# Altium PCB Wikiot-II.PcbDoc (part 1 of 2)
Units mil, origin at the board's own origin, x right, y up, seen from the top; angles counter-clockwise.
Board outline 3930 x 3935 mil, 2 copper layers (Top Layer, Bottom Layer); 209 components, 179 nets, 926 pads, 255 vias.
Unrouted connection lines stored in the file: 39.
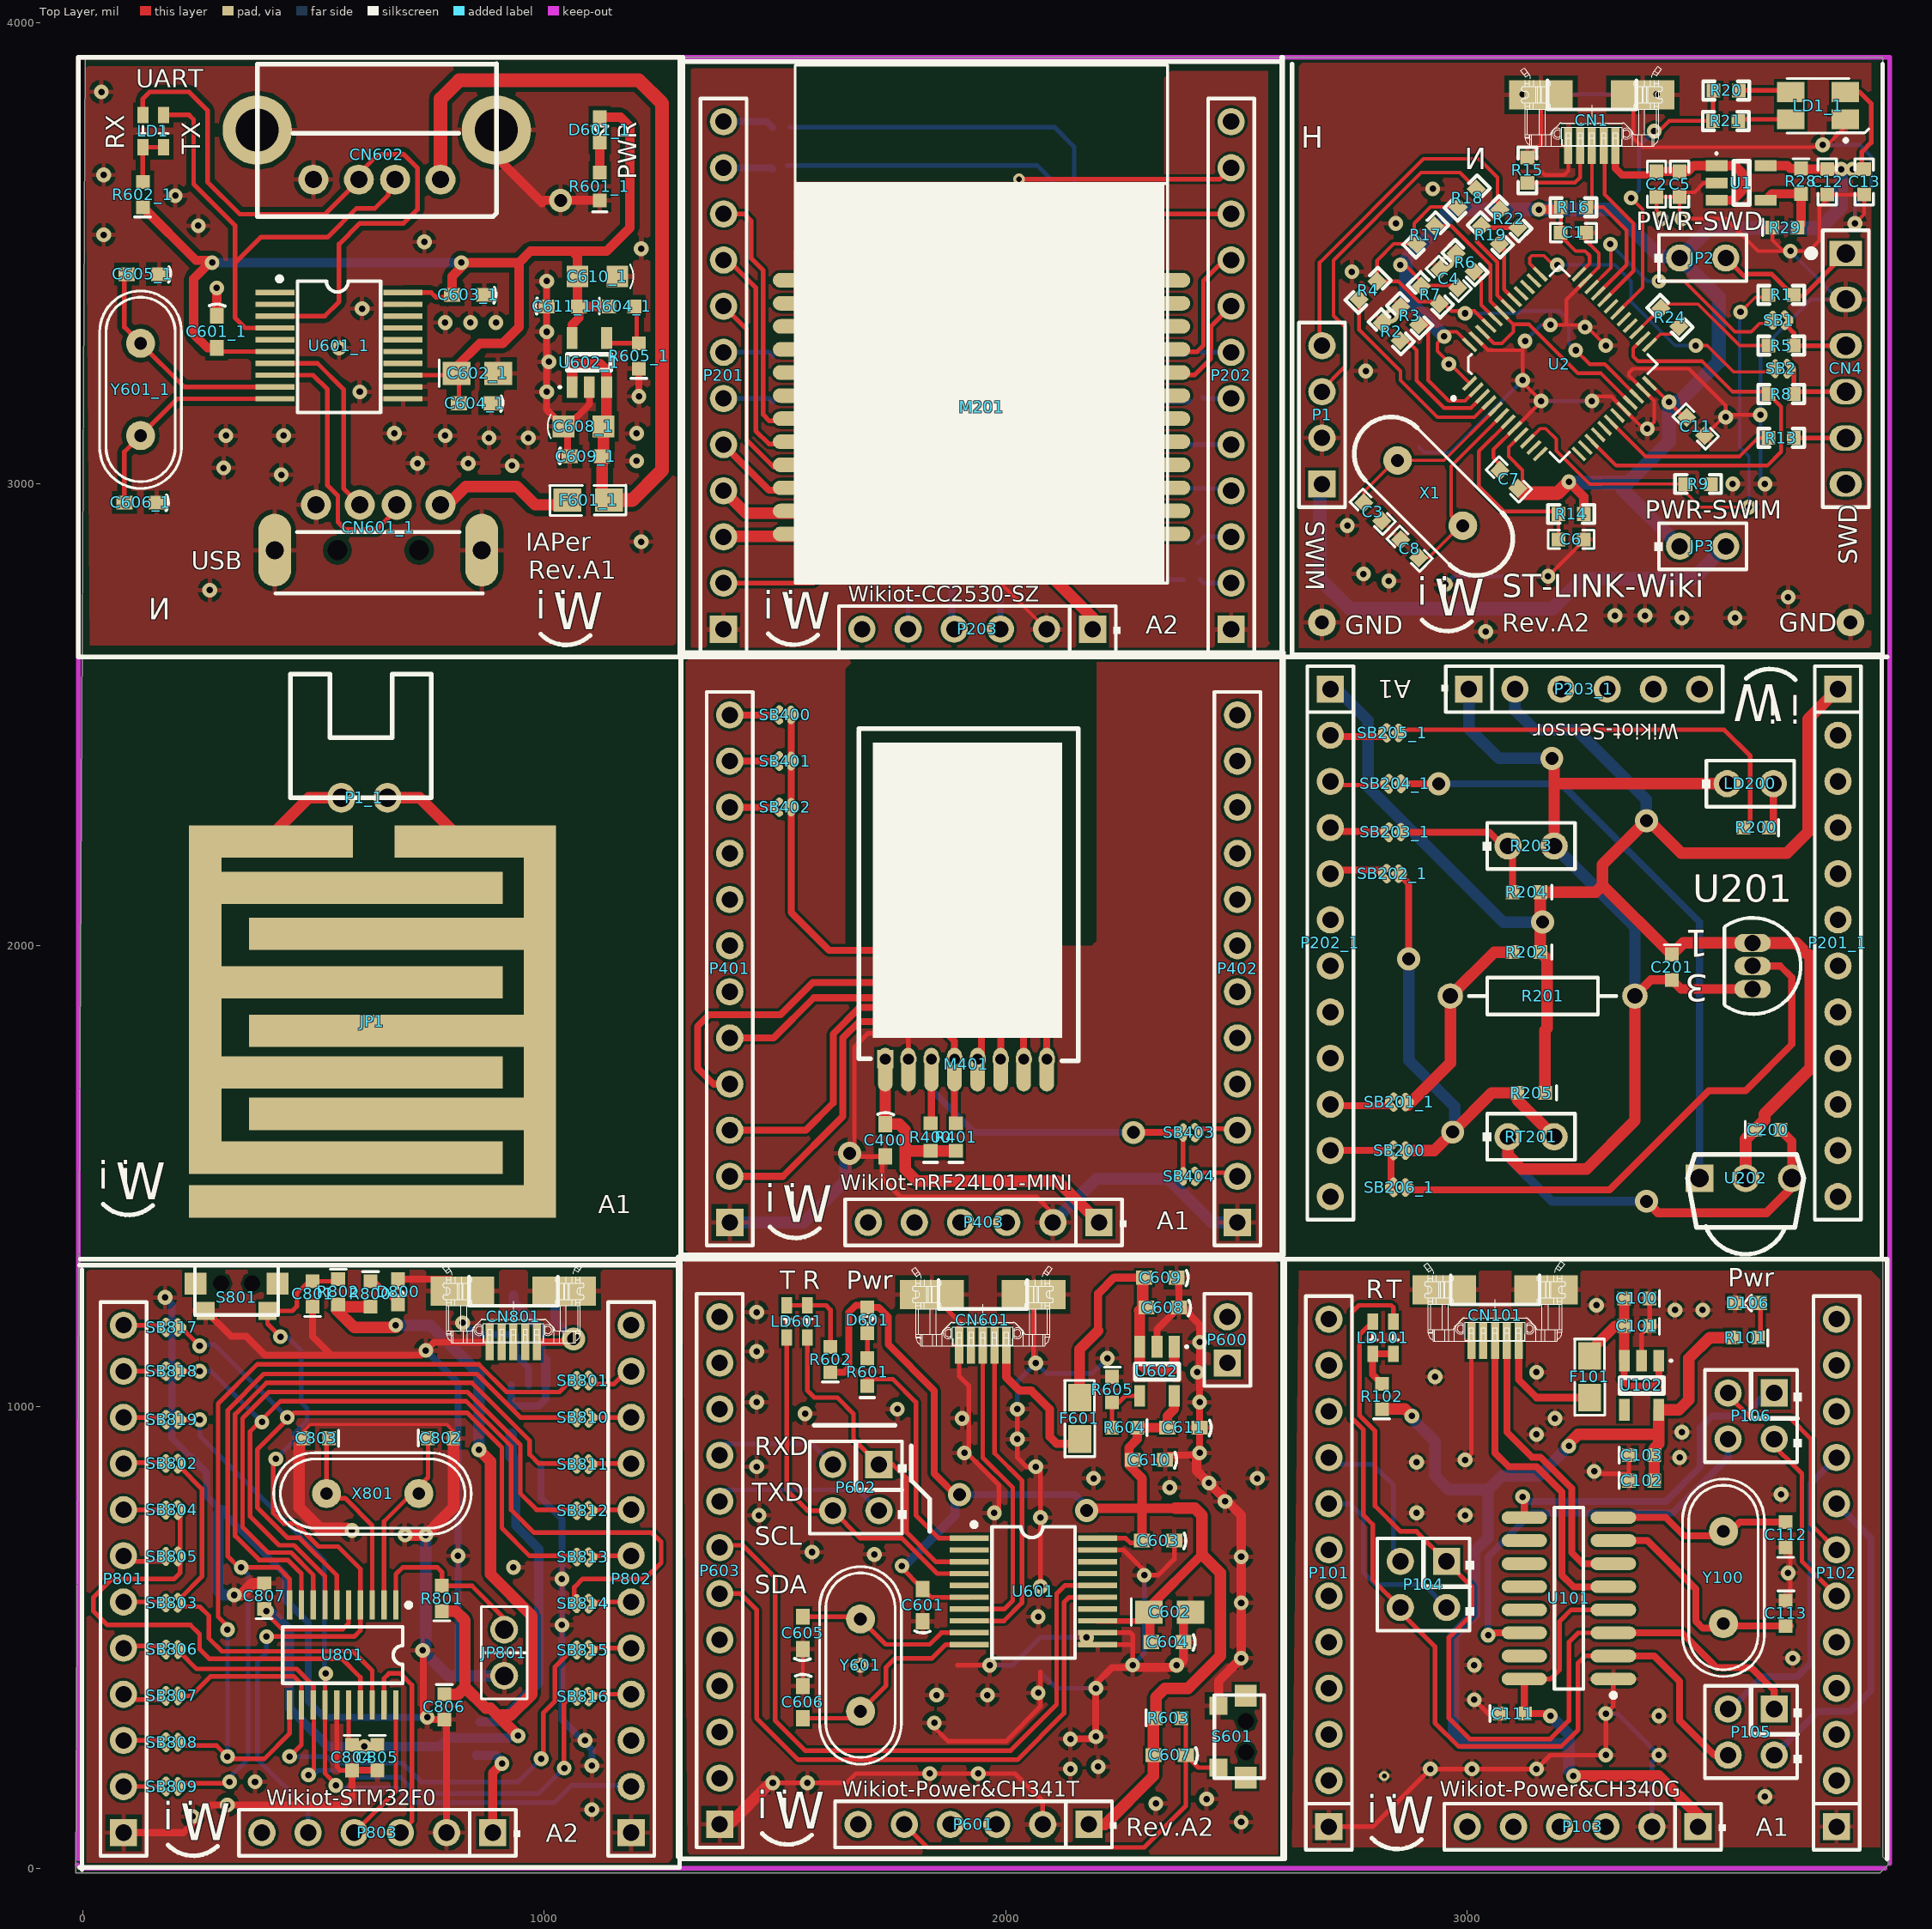
[diagram p0: Top Layer view]
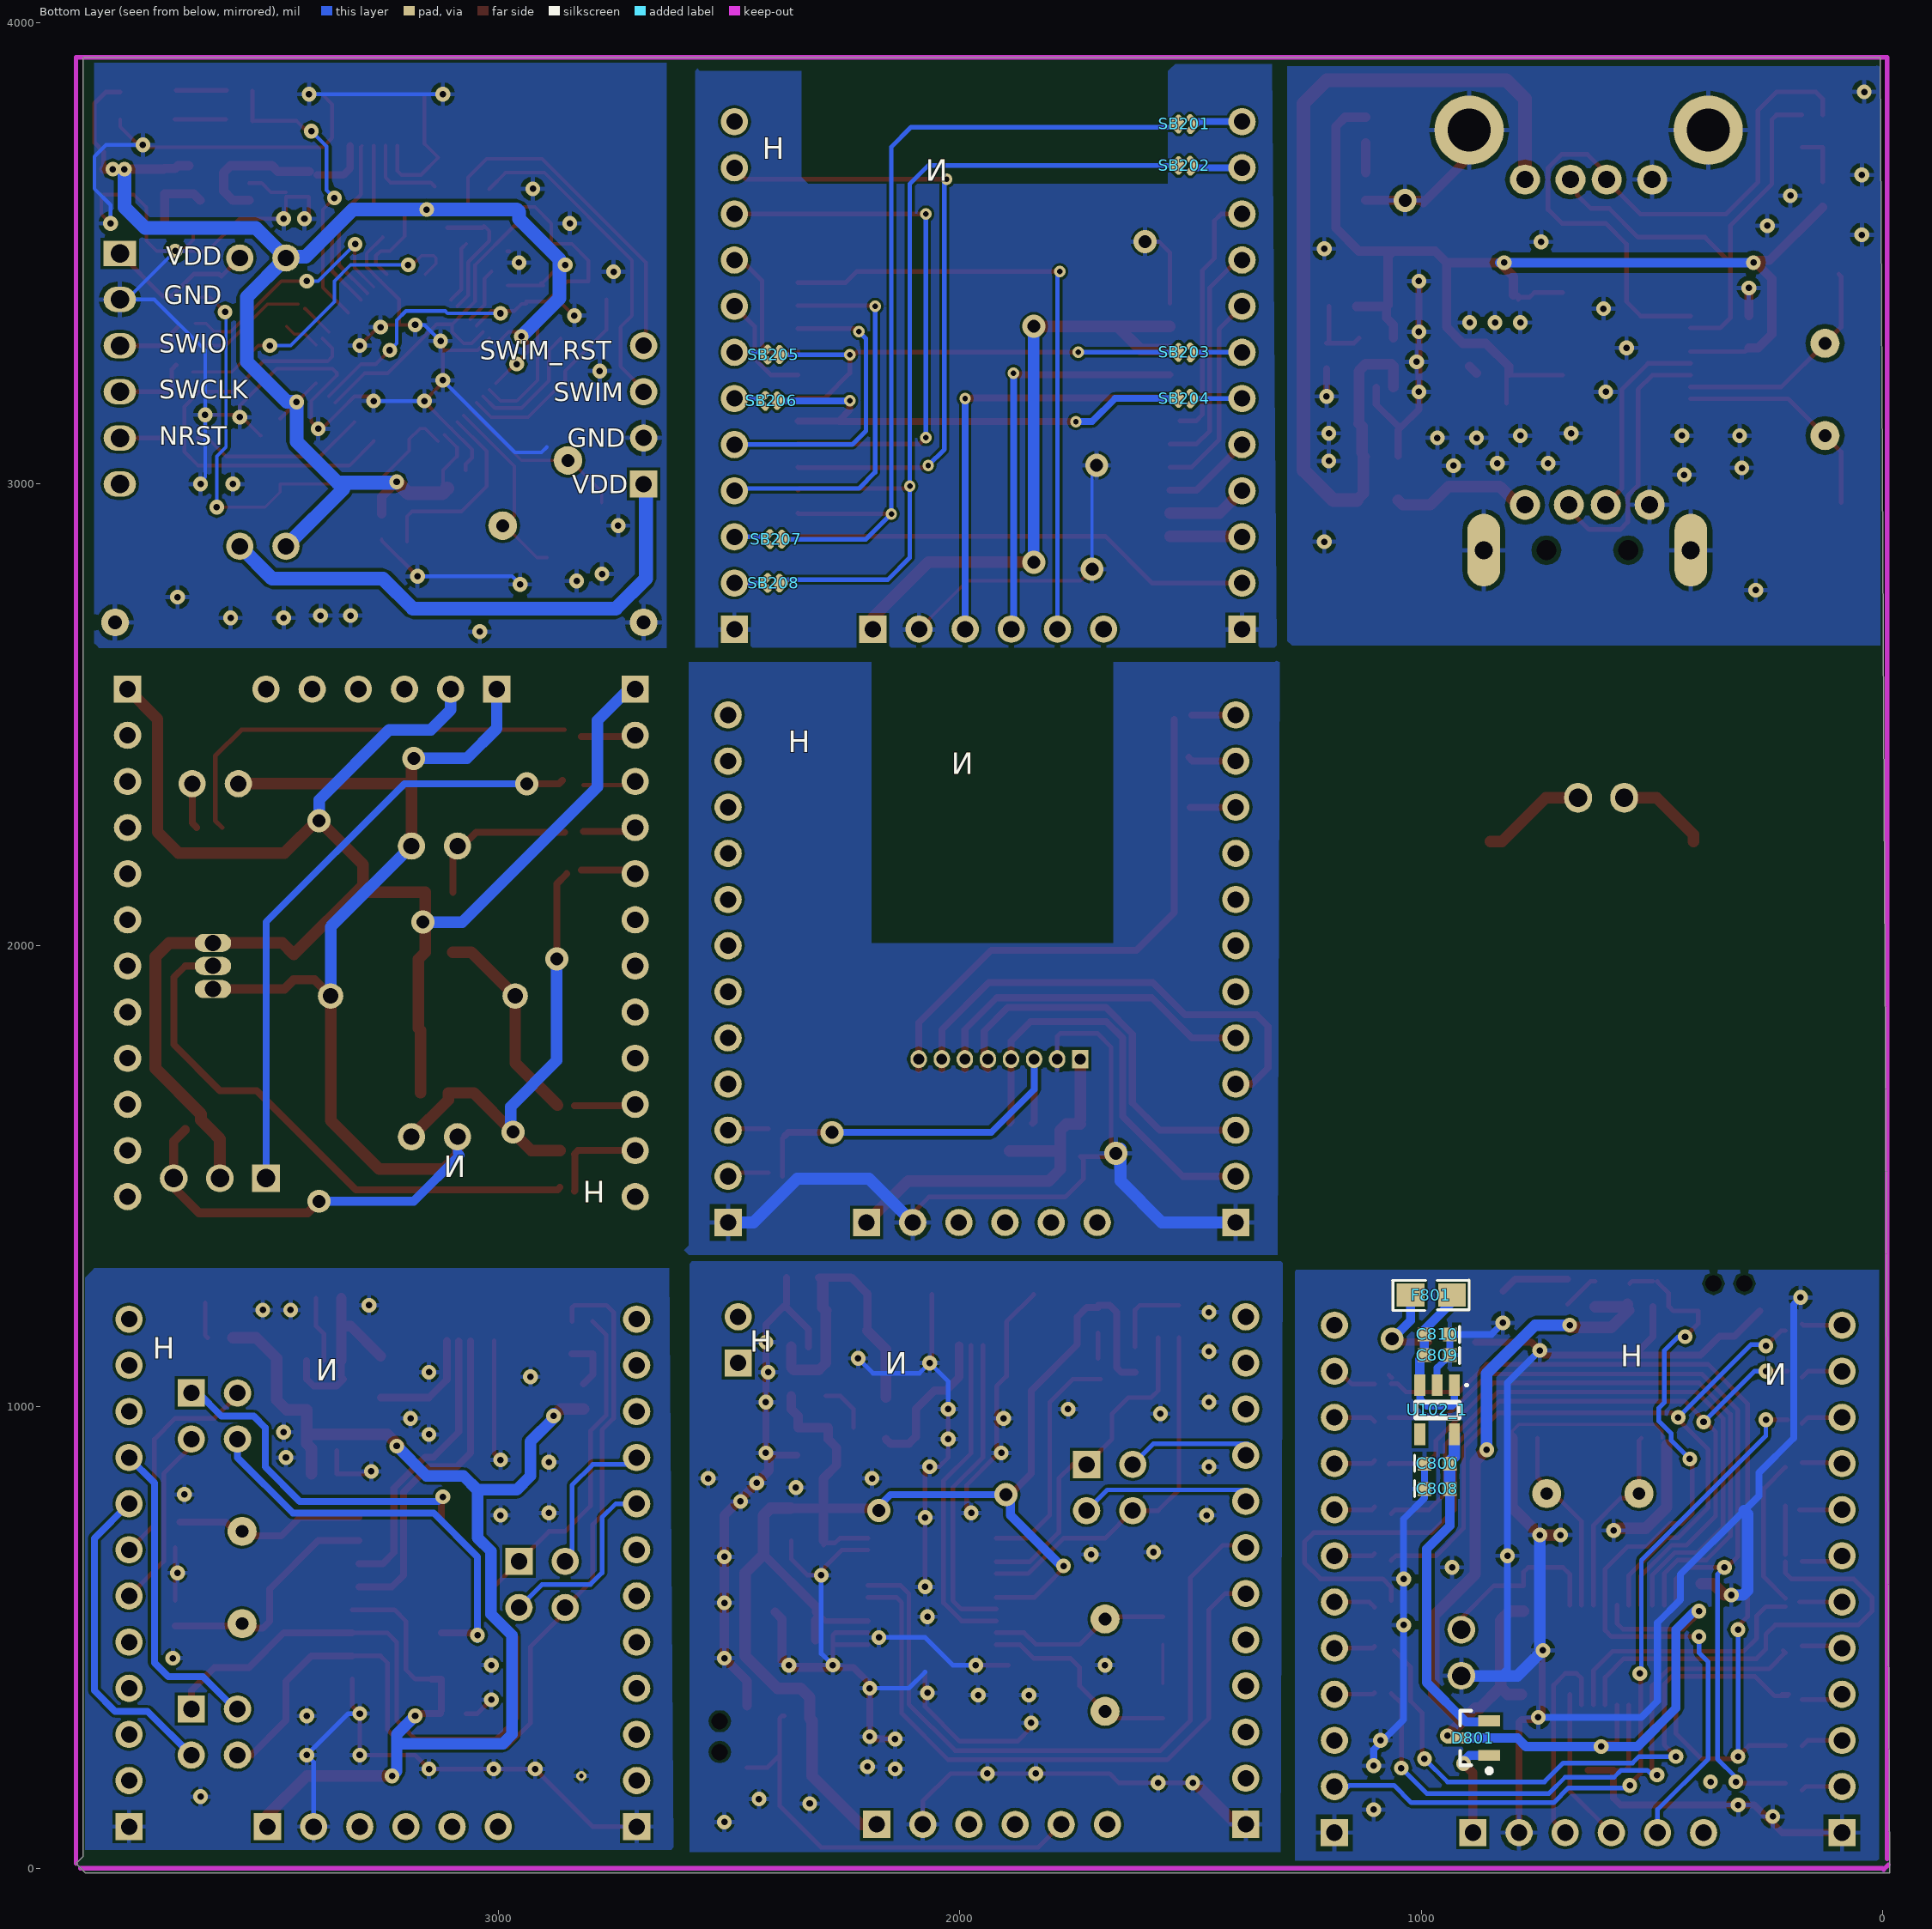
[diagram p1: Bottom Layer view, seen from below]

## Layer stack, top to bottom
Top Solder: solder mask 0.4, Solder Resist, Dk 3.5
Top Layer: signal copper 1.4
Dielectric1: dielectric 12.6, FR-4, Dk 4.8
Bottom Layer: signal copper 1.4
Bottom Solder: solder mask 0.4, Solder Resist, Dk 3.5

## Board outline
5,3925 3900,3925 3900,25 3915,10 3895,-10 -15,-10

## Design rules (kind name [scope] priority, off if disabled: settings)
Clearance [All] p1: gap=6
PolygonConnect [All] p1: connectstyle=Relief reliefconductorwidth=10 reliefentries=4 polygonreliefangle="90 Angle" airgapwidth=10
RoomDefinition Sensor [InComponentClass('Sensor')] p1: confinementstyle=ConfineIn formatcopy=TRUE lockcomponents=FALSE outline 3903.17,2625.46 2593.17,2625.46 2593.17,1325.46 3903.17,1325.46
RoomDefinition ST_LINK-Wiki [InComponentClass('ST_LINK-Wiki')] p2: confinementstyle=ConfineIn formatcopy=TRUE lockcomponents=FALSE outline 2610,2630 3900,2630 3900,3930 2610,3930
RoomDefinition IAPer [InComponentClass('IAPer')] p3: confinementstyle=ConfineIn formatcopy=TRUE lockcomponents=FALSE outline -10,3925 1295,3925 1295,2630 -10,2630
RoomDefinition CC2530-Module [InComponentClass('CC2530-Module')] p4: confinementstyle=ConfineIn formatcopy=TRUE lockcomponents=FALSE outline 1303.17,2605.46 2608.17,2605.46 2608.17,3920.46 1303.17,3920.46
RoomDefinition nRF24L01-Module [InComponentClass('nRF24L01-Module')] p5: confinementstyle=ConfineIn formatcopy=TRUE lockcomponents=FALSE outline 1291.83,1329.54 2606.83,1329.54 2606.83,2634.54 1291.83,2634.54
RoomDefinition STM32F030F [InComponentClass('STM32F030F')] p6: confinementstyle=ConfineIn formatcopy=TRUE lockcomponents=FALSE outline -12,-3 1293,-3 1293,1322 -12,1322
RoomDefinition Power&CH341T [InComponentClass('Power&CH341T')] p7: confinementstyle=ConfineIn formatcopy=TRUE lockcomponents=FALSE outline 1295,1325 2605,1325 2605,25 1295,25
RoomDefinition Power&CH340G [InComponentClass('Power&CH340G')] p8: confinementstyle=ConfineIn formatcopy=TRUE lockcomponents=FALSE outline 3920,1315 2615,1315 2615,25 3920,25
RoutingVias [All] p1: holewidth=12 width=25 viastyle="Through Hole" minholewidth=12 minwidth=25 maxholewidth=28 maxwidth=50
SolderMaskExpansion [All] p1: expansion=4
Width [All] p1: maxlimit=55 minlimit=7 preferedwidth=10
29 further rules are at their usual default settings.

## Classes and differential pairs
component class Power&CH340T: BT? CN? LS? U?

## Components (designator, comment, footprint, x,y, rotation, side; value= is the part's Value field where it differs from the comment)
C1 "100nF" 0603C 3230,3545 r0 top (schematic designator C7)
C2 "1uF_X5R_0603" 0603C 3410,3650 r270 top (schematic designator C9)
C3 "20pF" 0603C 2795,2940 r135 top (schematic designator C2)
C4 "100nF" 0603C 2960,3445 r135 top (schematic designator C6)
C5 "100nF" 0603C 3460,3650 r270 top (schematic designator C11)
C6 "100nF" 0603C 3225,2880 r0 top (schematic designator C4)
C7 "100nF" 0603C 3090,3010 r135 top (schematic designator C8)
C8 "20pF" 0603C 2875,2860 r315 top (schematic designator C1)
C11 "100nF" 0603C 3495,3125 r315 top (schematic designator C5)
C12 "100nF" 0603C 3780,3655 r270 top (schematic designator C13)
C13 "1uF_X5R_0603" 0603C 3860,3655 r90 top (schematic designator C10)
C100 "1uF" 0603M 3395,1235 r180 top
C101 "0.1uF" 0603M 3395,1175 r180 top
C102 "1uF" 0603M 3350,840 r0 top
C103 "0.1uF" 0603M 3350,895 r0 top
C111 "0.1uF" 0603M 3070,335 r0 top
C112 "22pF" 0603M 3690,695 r90 top
C113 "22pF" 0603M 3690,580 r270 top
C200 "0.1uF" 0603M 3623.17,1600.46 r0 top
C201 "0.1uF" 0603M 3443.17,1980.46 r270 top
C400 "0.1uF" C0603L 1738.72,1577.65 r270 top
C601 "0.1uF" C0603L 1820,570 r90 top
C601_1 "0.1uF" C0603L 290,3330 r270 top (schematic designator C601)
C602 "1uF" 0805M 2310,555 r0 top
C602_1 "1uF" 0805M 810,3240 r0 top (schematic designator C602)
C603 "Cap" C0603L 2330,710 r180 top
C603_1 "Cap" C0603L 835,3410 r180 top (schematic designator C603)
C604 "Cap" C0603L 2350,490 r180 top
C604_1 "Cap" C0603L 850,3175 r180 top (schematic designator C604)
C605 "Cap" C0603L 1560,510 r90 top
C605_1 "Cap" C0603L 130,3455 r180 top (schematic designator C605)
C606 "Cap" C0603L 1560,360 r270 top
C606_1 "Cap" C0603L 125,2960 r180 top (schematic designator C606)
C607 "10uF" C0603L 2355,245 r180 top
C608 "Cap" C0603L 2340,1215 r180 top
C608_1 "22uF" C0805 1085,3125 r0 top (schematic designator C608)
C609 "Cap" C0603L 2335,1280 r180 top
C609_1 "104" C0603L 1090,3060 r0 top (schematic designator C609)
C610 "Cap" C0603L 2310,885 r180 top
C610_1 "22uF" C0805 1115,3450 r180 top (schematic designator C610)
C611 "Cap" C0603L 2385,955 r180 top
C611_1 "104" C0603L 1040,3385 r0 top (schematic designator C611)
C800 "1uF" 0603M 993,877 r180 bottom
C801 "100nF" 0603M 498,1217 r90 top
C802 "20pF" 0603M 748,932 r0 top
C803 "20pF" 0603M 533,932 r180 top
C804 "1uF" 0603M 583,267 r270 top
C805 "100nF" 0603M 638,267 r270 top
C806 "100nF" 0603M 783,377 r270 top
C807 "100nF" 0603M 393,562 r90 top
C808 "0.1uF" 0603M 993,822 r180 bottom
C809 "0.1uF" 0603M 938,1112 r0 bottom
C810 "1uF" 0603M 938,1157 r0 bottom
CN1 "USB-Micro" USB-MICRO-Lite 3270,3840 r0 top (schematic designator CN3)
CN4 "Header 6X1" 1*6P 3820,3500 r270 top (schematic designator CN1)
CN101 "USB-Micro" USB-MICRO-Female-Lite 3060,1250 r0 top
CN601 "USB-Micro" USB-MICRO-Lite 1950,1240 r0 top
CN601_1 "USB" USB-A-MALE 415,2855 r270 top (schematic designator CN601)
CN602 "USB" USB-A-Female-Lite 775,3660 r0 top
CN801 "USB-Micro" USB-MICRO-Female-Lite 933,1247 r0 top
D106 "RED" 0603pn 3635,1225 r180 top
D601 "LED1" 0603pn 1700,1215 r270 top
D601_1 "LED1" 0603pn 1120,3795 r270 top (schematic designator D601)
D800 "RED" 0603pn 683,1222 r90 top
D801 "BAT54C" BAT54C 888,282 r0 bottom
F101 "500mA" 0805 3265,1110 r270 top
F601 "500mA" 0805 2160,1020 r270 top
F601_1 "500mA" 0805 1140,2965 r180 top (schematic designator F601)
F801 "500mA" 0805 933,1242 r0 bottom
JP1 "WaterDropSensor" WATERDROP 230,1455 r0 top
JP2 "" HDR1X2/2.54mm 3460,3490 r0 top
JP3 "" HDR1X2/2.54mm 3460,2865 r0 top
JP801 "Jumper2" SIP2 913,417 r90 top
LD1 "LTST-C195KGJRKT" 0805-LED-Bi 155,3805 r270 top
LD1_1 "LD_BICOLOR_CMS" HSMF-A201 3760,3820 r180 top (schematic designator LD1)
LD101 "LTST-C195KGJRKT" 0805-LED-Bi 2820,1190 r270 top
LD200 "IR LED" HDR1X2/2.54mm 3563.17,2350.46 r0 top
LD601 "LTST-C195KGJRKT" 0805-LED-Bi 1545,1145 r90 top
M201 "CC2530 SZ1" CC2530-SMT 1543.17,2785.46 r0 top
M401 "nRF24L01-Mini" nRF24L01-Mini 1736.83,1749.54 r90 top
P1 "Header 4" HDR1X4 2685,3000 r90 top
P1_1 "Header 2H" XH2.54-2P 660,2320 r0 top (schematic designator P1)
P101 "Synio Header-L 12-Pin" HDR1X12 2700,90 r90 top
P102 "Synio Header-R 12-Pin" HDR1X12 3800,90 r90 top
P103 "Synio Power Header 6 Pin" HDR1X6/2.54MM 3500,90 r180 top
P104 "Header 2X2" HDR2X2/2.54MM 2955,665 r180 top
P105 "Header 2X2" HDR2X2/2.54MM 3665,345 r180 top
P106 "Header 2X2" HDR2X2/2.54MM 3665,1030 r180 top
P201 "Synio Header-L 12-Pin" HDR1X12 1388.17,2685.46 r90 top
P201_1 "Synio Header-L 12-Pin" HDR1X12 3803.17,2555.46 r270 top (schematic designator P201)
P202 "Synio Header-R 12-Pin" HDR1X12 2488.17,2685.46 r90 top
P202_1 "Synio Header-R 12-Pin" HDR1X12 2703.17,2555.46 r270 top (schematic designator P202)
P203 "Synio Power Header 6 Pin" HDR1X6/2.54MM 2188.17,2685.46 r180 top
P203_1 "Synio Power Header 6 Pin" HDR1X6/2.54MM 3003.17,2555.46 r0 top (schematic designator P203)
P401 "Synio Header-L 12-Pin" HDR1X12 1401.83,1399.54 r90 top
P402 "Synio Header-R 12-Pin" HDR1X12 2501.83,1399.54 r90 top
P403 "Synio Power Header 6 Pin" HDR1X6/2.54MM 2201.83,1399.54 r180 top
P600 "Header 2" HDR1X2 2480,1095 r90 top
P601 "Synio Power Header 6 Pin" HDR1X6/2.54MM 2180,95 r180 top
P602 "Header 2X2" HDR2X2/2.54MM 1725,875 r180 top
P603 "Synio Header-L 12-Pin" HDR1X12 1380,95 r90 top
P801 "Synio Header-L 12-Pin" HDR1X12 88,77 r90 top
P802 "Synio Header-R 12-Pin" HDR1X12 1188,77 r90 top
P803 "Synio Power Header 6 Pin" HDR1X6/2.54MM 888,77 r180 top
R1 "4.7K" 0603R 3680,3410 r180 top (schematic designator R5)
R2 "10K[N/A]" 0603R 2835,3330 r135 top (schematic designator R6)
R3 "10K" 0603R 2875,3365 r135 top (schematic designator R4)
R4 "NC" 0603R 2785,3420 r45 top
R5 "22" 0603R 3680,3300 r0 top (schematic designator R8)
R6 "100K" 0603R 2995,3480 r135 top (schematic designator R3)
R7 "680" 0603R 2920,3410 r315 top
R8 "22" 0603R 3680,3195 r0 top (schematic designator R9)
R9 "4.7K" 0603R 3500,3000 r180 top (schematic designator R7)
R13 "22" 0603R 3680,3100 r0 top (schematic designator R10)
R14 "100K" 0603R 3225,2935 r180 top (schematic designator R12)
R15 "100K" 0603R 3130,3680 r270 top (schematic designator R26)
R16 "1K5" 0603R 3230,3600 r0 top (schematic designator R23)
R17 "220" 0603R 2910,3540 r45 top
R18 "220" 0603R 3000,3620 r225 top
R19 "220" 0603R 3050,3540 r315 top
R20 "100" 0603R 3561,3853 r180 top (schematic designator R18)
R21 "100" 0603R 3560,3787 r180 top (schematic designator R17)
R22 "220" 0603R 3090,3575 r315 top
R24 "100" 0603R 3439,3361 r315 top (schematic designator R16)
R28 "NC" 0603M 3723,3684 r270 top
R29 "NC" 0603M 3661,3556 r0 top
R101 "1K" 0603M 3630,1150 r180 top
R102 "1K" 0603M 2815,995 r90 top
R200 "360R" 0603M 3653.17,2255.46 r180 top
R201 "Res3" AXIAL-0.4 3163.17,1890.46 r0 top
R202 "10K" R0603 3128.17,1985.46 r180 top
R203 "Res3" HDR1X2/2.54mm 3088.17,2215.46 r0 top
R204 "10K" R0603 3128.17,2115.46 r180 top
R205 "10K" R0603 3138.17,1680.46 r180 top
R400 "1K" R0603 1836.83,1584.54 r90 top
R401 "1K" R0603 1891.83,1584.54 r90 top
R601 "1K" R0603 1700,1075 r90 top
R601_1 "1K" R0603 1120,3645 r90 top (schematic designator R601)
R602 "1K" 0603M 1620,1075 r90 top
R602_1 "1K" 0603M 130,3600 r90 top (schematic designator R602)
R603 "10K" 0603M 2325,325 r0 top
R604 "NC" 0603M 2285,955 r180 top
R604_1 "NC" 0603M 1140,3385 r0 top (schematic designator R604)
R605 "NC" 0603M 2230,1065 r270 top
R605_1 "NC" 0603M 1205,3250 r90 top (schematic designator R605)
R800 "1K" 0603M 623,1272 r270 top
R801 "10K" 0603M 778,557 r90 top
R802 "100K" 0603M 553,1277 r270 top
RT201 "NTC-MF52AT 10K 5％" HDR1X2/2.54mm 3088.17,1585.46 r0 top
S601 "RESET" KEY-2x4-SMD 2520,285 r270 top
S801 "RESET" KEY-2x4-SMD 333,1267 r0 top
SB1 "Circuit Breaker" JP2_SMD 3675,3355 r180 top
SB2 "Circuit Breaker" JP2_SMD 3680,3250 r180 top
SB200 "Circuit Breaker" JP2_SMD 2853.17,1555.46 r0 top
SB201 "Circuit Breaker" JP2_SMD 1513.17,3780.46 r0 bottom
SB201_1 "Circuit Breaker" JP2_SMD 2853.17,1660.46 r0 top (schematic designator SB201)
SB202 "Circuit Breaker" JP2_SMD 1513.17,3690.46 r0 bottom
SB202_1 "Circuit Breaker" JP2_SMD 2838.17,2155.46 r0 top (schematic designator SB202)
SB203 "Circuit Breaker" JP2_SMD 1513.17,3285.46 r0 bottom
SB203_1 "Circuit Breaker" JP2_SMD 2843.17,2245.46 r0 top (schematic designator SB203)
SB204 "Circuit Breaker" JP2_SMD 1513.17,3185.46 r0 bottom
SB204_1 "Circuit Breaker" JP2_SMD 2843.17,2350.46 r0 top (schematic designator SB204)
SB205 "Circuit Breaker" JP2_SMD 2403.17,3280.46 r180 bottom
SB205_1 "Circuit Breaker" JP2_SMD 2838.17,2460.46 r0 top (schematic designator SB205)
SB206 "Circuit Breaker" JP2_SMD 2408.17,3180.46 r180 bottom
SB206_1 "Circuit Breaker" JP2_SMD 2853.17,1475.46 r0 top (schematic designator SB206)
SB207 "Circuit Breaker" JP2_SMD 2398.17,2880.46 r180 bottom
SB208 "Circuit Breaker" JP2_SMD 2403.17,2785.46 r180 bottom
SB400 "Circuit Breaker" JP2_SMD 1521.83,2499.54 r0 top
SB401 "Circuit Breaker" JP2_SMD 1521.83,2399.54 r0 top
SB402 "Circuit Breaker" JP2_SMD 1521.83,2299.54 r0 top
SB403 "Circuit Breaker" JP2_SMD 2396.83,1594.54 r180 top
SB404 "Circuit Breaker" JP2_SMD 2396.83,1499.54 r180 top
SB801 "Circuit Breaker" JP2_SMD 1083,1057 r180 top
SB802 "Circuit Breaker" JP2_SMD 192.74,877 r180 top
SB803 "Circuit Breaker" JP2_SMD 192.74,574.97 r180 top
SB804 "Circuit Breaker" JP2_SMD 192.74,776.32 r180 top
SB805 "Circuit Breaker" JP2_SMD 192.74,675.65 r180 top
SB806 "Circuit Breaker" JP2_SMD 193,474.03 r0 top
SB807 "Circuit Breaker" JP2_SMD 193,373.35 r0 top
SB808 "Circuit Breaker" JP2_SMD 193,272.68 r0 top
SB809 "Circuit Breaker" JP2_SMD 193,177 r0 top
SB810 "Circuit Breaker" JP2_SMD 1083,976.29 r180 top
SB811 "Circuit Breaker" JP2_SMD 1083,875.57 r180 top
SB812 "Circuit Breaker" JP2_SMD 1083,774.86 r180 top
SB813 "Circuit Breaker" JP2_SMD 1083,674.14 r180 top
SB814 "Circuit Breaker" JP2_SMD 1083,573.43 r180 top
SB815 "Circuit Breaker" JP2_SMD 1083,472.71 r180 top
SB816 "Circuit Breaker" JP2_SMD 1083,372 r180 top
SB817 "Circuit Breaker" JP2_SMD 193,1172 r0 top
SB818 "Circuit Breaker" JP2_SMD 193,1077 r0 top
SB819 "Circuit Breaker" JP2_SMD 193,972 r0 top
U1 "LDO" SOT23-5 3540,3690 r270 top (schematic designator U2)
U2 "STM32F103CBT6" "QFP48 7X7" 3200,3260 r315 top (schematic designator U1)
U101 "CH340G" SO16_M 3220,585 r180 top
U102 "LDO" SOT23-5 3415,1100 r180 top
U102_1 "LDO" SOT23-5 928,1047 r0 bottom (schematic designator U102)
U201 "DS18B20" TO92 3618.17,1955.46 r180 top
U202 "IR 1838" TSOP18 3603.17,1495.46 r0 top
U601 "CH341T" SSOP20 2060,600 r270 top
U601_1 "CH341T" SSOP20 555,3300 r270 top (schematic designator U601)
U602 "LDO" SOT23-5 2365,1130 r180 top
U602_1 "LDO" SOT23-5 1060,3210 r0 top (schematic designator U602)
U801 "STM32F030F4" TSSOP20 563,462 r180 top
X1 "8MHz(12pF)" XTAL1 2990,2910 r135 top
X801 "8MHz" XTAL_49S 628,812 r0 top
Y100 "12MHz" XTAL_49S 3555,630 r90 top
Y601 "12MHz" XTAL_49S 1685,440 r90 top
Y601_1 "12MHz" XTAL_49S 125,3205 r90 top (schematic designator Y601)

## Footprints (in the part's own frame and the unit in brackets; to place one, negate y for a bottom-side part, rotate by r counter-clockwise, add the part's x,y. Pads: shape width x height; smd on the part's side, far side on the other; paste and mask are expansions set on the pad)
1*6P [mil]
  rect 55x70 hole 40: 1(0,0)
  oval 55x70 hole 40: 2(100,0) 3(200,0) 4(300,0) 5(400,0) 6(500,0)
  silkscreen extent -50,-82 550,50
0603C [mil]
  rect 30x30 smd: 1(27.5,0) 2(-27.5,0)
  silkscreen extent -50,-20 50,20
0603M [mil]
  rect 30x30 smd: 1(0,0) 2(55,0)
  silkscreen extent -21,-17 -21,18, body extent -5,-15 60,15, height 43
0603pn [mil]
  rect 30x30 smd: 1(0,0) 2(55,0)
  silkscreen extent 19,-17 36,18
0603R [mil]
  rect 30x30 smd: 1(27.5,0) 2(-27.5,0)
  silkscreen extent -50,-20 50,20
0805 [mil]
  rect 60x50 smd: 1(0,0) 2(90,0)
  silkscreen extent -37,-33 129,33
0805-LED-Bi [mm]
  rect 0.9x0.6 smd: 1(0.127,-0.635) 2(0.127,0.508) 3(1.905,0.508) 4(1.905,-0.635)
  silkscreen extent 0.76,-0.89 1.14,0.76, body extent 0.32,-1.02 1.72,0.9, height 1.1
0805M [mil]
  rect 60x50 smd: 1(0,0) 2(90,0)
  silkscreen extent -38,-29 -38,29
AXIAL-0.4 [mm] "Axial Device, Thru-Hole; 2 Leads; 0.4 in Pin Spacing"
  round 1.4 hole 0.85: 1(-5.08,0) 2(5.08,0)
  silkscreen extent -4.06,-1.02 4.06,1.02
BAT54C [mm] "SOT23, 3-Leads, Body 2.9x1.3mm, Pitch 0.95mm, Lead Span 2.5mm, IPC High Density"
  rect 1.2x0.6 smd: 1(-0.9,0.95) 2(-0.9,-0.95) 3(0.9,0)
  silkscreen extent -1.02,-1.5 0.7,1.92, body extent -0.7,-1.5 0.7,1.5, height 1.1
C0603L [mil]
  rect 35x30 smd: 1(-35,0) 2(35,0)
  silkscreen extent -60,-16 -56,18, body extent -31,-16 32,15, height 24
C0805 [mm]
  rect 1.2x1.2 smd: 1(-1.1,0) 2(1.1,0)
  silkscreen extent -1.97,-0.65 -1.8,0.65, body extent -0.99,-0.61 1.01,0.59, height 1.2
CC2530-SMT [mm]
  oval 2.5x0.8 smd: 1(0.031,16.67) 2(0.031,15.4) 3(0.031,14.13) 4(0.031,12.86) 5(0.031,11.59) 6(0.031,10.32) 7(0.031,9.05) 8(0.031,7.78) 9(0.031,6.51) 10(0.031,5.24) 11(0.031,3.97) 12(0.031,2.7) 13(20.5,2.7) 14(20.5,3.97) 15(20.5,5.24) 16(20.5,6.51) 17(20.5,7.78) 18(20.5,9.05) 19(20.5,10.32) 20(20.5,11.59) 21(20.5,12.86) 22(20.5,14.13) 23(20.5,15.4) 24(20.5,16.67)
  silkscreen extent 0,0 20.5,28.5
HDR1X2 [mm] "Connector; Header; 2 Position"
  rect 1.5x1.5 hole 0.9: 1(0,0)
  round 1.5 hole 0.9: 2(2.54,0)
  silkscreen extent -1.27,-1.27 3.81,1.27
HDR1X2/2.54mm [mm]
  round 1.5 hole 0.9: 1(0,0) 2(2.54,0)
  silkscreen extent -1.4,-1.27 3.68,1.27
HDR1X4 [mm] "Connector; Header; 4 Position"
  rect 1.5x1.5 hole 0.9: 1(0,0)
  round 1.5 hole 0.9: 2(2.54,0) 3(5.08,0) 4(7.62,0)
  silkscreen extent -1.27,-1.27 8.89,1.27
HDR1X6/2.54MM [mm] "Connector; Header; 6 Position"
  rect 1.5x1.5 hole 0.9: 1(0,0)
  round 1.5 hole 0.9: 2(2.54,0) 3(5.08,0) 4(7.62,0) 5(10.16,0) 6(12.7,0)
  silkscreen extent -1.52,-1.27 13.97,1.27
HDR1X12 [mm] "Connector; Header; 12 Position"
  rect 1.5x1.5 hole 0.9: 1(0,0)
  round 1.5 hole 0.9: 2(2.54,0) 3(5.08,0) 4(7.62,0) 5(10.16,0) 6(12.7,0) 7(15.24,0) 8(17.78,0) 9(20.32,0) 10(22.86,0) 11(25.4,0) 12(27.94,0)
  silkscreen extent -1.27,-1.27 29.21,1.27
HDR2X2/2.54MM [mm] "Connector; Header; 2x2 Position"
  rect 1.5x1.5 hole 0.9: 1(0,0)
  round 1.5 hole 0.9: 2(0,2.54) 3(2.54,0) 4(2.54,2.54)
  silkscreen extent -1.52,-1.27 3.81,3.81
HSMF-A201 [mm]
  rect 1.5x1.1 smd: 1(-1.5,0.75) 2(1.5,0.75) 3(1.5,-0.75) 4(-1.5,-0.75)
  silkscreen extent -2.79,-1.5 1.7,1.96
JP2_SMD [mil]
  oct 15x30 smd rot 45: 1(-18,-8) 2(18,7)
  oct 15.75x30 smd rot 135: 1(-18,8)
  rect 26x26 smd rot 45: 2(13,0)
  oct 15x30 smd rot 135: 2(18,-7)
KEY-2x4-SMD [mm] "6.8MM,2.8MM,SMD"
  rect 1.2x1.2 smd: 0(-2.25,0) 0(2.25,0)
  rect 1x1 smd: 1(-1.7,-1.5) 2(1.7,-1.5)
  round 0.8 hole 0.9 unplated: MH1(0.85,0) MH2(-0.85,0)
  silkscreen extent -2.29,-1.73 2.29,1.02, body extent -2.28,-1.6 2.29,0.94, height 1.1
nRF24L01-Mini [mm]
  oval 2.4x0.8 smd: 1(-0.477,-0.048) 2(-0.477,-1.318) 3(-0.477,-2.588) 4(-0.477,-3.858) 5(-0.477,-5.128) 6(-0.477,-6.398) 7(-0.477,-7.668) 8(-0.477,-8.938)
  rect 1x0.9 hole 0.6: 1(0.102,-0.051)
  oval 1x0.9 hole 0.6: 2(0.102,-1.321) 3(0.102,-2.591) 4(0.102,-3.861) 5(0.102,-5.131) 6(0.102,-6.401) 7(0.102,-7.671) 8(0.102,-8.941)
  silkscreen extent 0,-10.67 18.29,1.4
"QFP48 7X7" [mm]
  rect 0.2x1 smd: 1(-2.75,-4.25) 2(-2.25,-4.25) 3(-1.75,-4.25) 4(-1.25,-4.25) 5(-0.75,-4.25) 6(-0.25,-4.25) 7(0.25,-4.25) 8(0.75,-4.25) 9(1.25,-4.25) 10(1.75,-4.25) 11(2.25,-4.25) 12(2.75,-4.25) 25(2.75,4.25) 26(2.25,4.25) 27(1.75,4.25) 28(1.25,4.25) 29(0.75,4.25) 30(0.25,4.25) 31(-0.25,4.25) 32(-0.75,4.25) 33(-1.25,4.25) 34(-1.75,4.25) 35(-2.25,4.25) 36(-2.75,4.25)
  rect 1x0.2 smd: 13(4.25,-2.75) 14(4.25,-2.25) 15(4.25,-1.75) 16(4.25,-1.25) 17(4.25,-0.75) 18(4.25,-0.25) 19(4.25,0.25) 20(4.25,0.75) 21(4.25,1.25) 22(4.25,1.75) 23(4.25,2.25) 24(4.25,2.75) 37(-4.25,2.75) 38(-4.25,2.25) 39(-4.25,1.75) 40(-4.25,1.25) 41(-4.25,0.75) 42(-4.25,0.25) 43(-4.25,-0.25) 44(-4.25,-0.75) 45(-4.25,-1.25) 46(-4.25,-1.75) 47(-4.25,-2.25) 48(-4.25,-2.75)
  silkscreen extent -3.81,-5.52 3.81,3.81
R0603 [mil]
  rect 30x30 smd: 1(-30,0) 2(30,0)
  silkscreen extent -55,-15 -55,15, body extent -31,-16 32,15, height 18
SIP2 [mil]
  round 60 hole 40: 1(0,0) 2(100,0)
  silkscreen extent -50,-50 150,50
SO16_M [mm] "16-Pin Small Outline Integrated Circuit 1.27 mm Pitch, IPC Low Density"
  oval 2.5x0.7 smd: 1(-2.45,4.445) 2(-2.45,3.175) 3(-2.45,1.905) 4(-2.45,0.635) 5(-2.45,-0.635) 6(-2.45,-1.905) 7(-2.45,-3.175) 8(-2.45,-4.445) 9(2.45,-4.445) 10(2.45,-3.175) 11(2.45,-1.905) 12(2.45,-0.635) 13(2.45,0.635) 14(2.45,1.905) 15(2.45,3.175) 16(2.45,4.445)
  silkscreen extent -2.58,-5 0.8,5.47, body extent -2,-5 2,5, height 1.75
SOT23-5 [mm]
  rect 0.6x1.2 smd: 1(0,0) 2(0.95,0) 3(1.9,0) 4(1.9,2.7) 5(0,2.7)
  silkscreen extent -0.69,0 2.13,1.8, body extent -0.32,0.7 2.35,2.1, height 1.1
SSOP20 [mm] "SSOP, Plastic; 20 Leads; Body Width 5.3 mm; Pitch 0.65 mm"
  rect 0.3x2.15 smd: 1(-2.925,-3.529) 2(-2.275,-3.529) 3(-1.625,-3.529) 4(-0.975,-3.529) 5(-0.325,-3.529) 6(0.325,-3.529) 7(0.975,-3.529) 8(1.625,-3.529) 9(2.275,-3.529) 10(2.925,-3.529) 11(2.925,3.529) 12(2.275,3.529) 13(1.625,3.529) 14(0.975,3.529) 15(0.325,3.529) 16(-0.325,3.529) 17(-0.975,3.529) 18(-1.625,3.529) 19(-2.275,3.529) 20(-2.925,3.529)
  silkscreen extent -3.8,-3.4 3.68,2.29
TO92 [mm] "TO, Flat Index; 3 In-Line, Axial Leads; Body Dia. 4.8mm; Leads 0.51 x 0.51 mm (max)"
  oval 2x1 hole 0.9: 1(0,-1.27) 2(0,0) 3(0,1.27)
  silkscreen extent -2.65,-2.65 1.55,2.65
TSOP18 [mil]
  rect 60x60 hole 40: 1(-100,0)
  round 60 hole 40: 2(0,0) 3(100,0)
  silkscreen extent -126,-165 126,51
TSSOP20 [mm] "Shrink Small Outline; 20 Leads; Body Width 4.4 mm; Pitch 0.65 mm"
  rect 0.3x1.6 smd: 1(-2.925,-2.75) 2(-2.275,-2.75) 3(-1.625,-2.75) 4(-0.975,-2.75) 5(-0.325,-2.75) 6(0.325,-2.75) 7(0.975,-2.75) 8(1.625,-2.75) 9(2.275,-2.75) 10(2.925,-2.75) 11(2.925,2.75) 12(2.275,2.75) 13(1.625,2.75) 14(0.975,2.75) 15(0.325,2.75) 16(-0.325,2.75) 17(-0.975,2.75) 18(-1.625,2.75) 19(-2.275,2.75) 20(-2.925,2.75)
  silkscreen extent -3.75,-2.87 3.3,1.55
USB-A-Female-Lite [mil]
  round 150 hole 93: 0(-397,107) 0(121,107)
  round 65 hole 37: 1(0,0) 2(-98.5,0) 3(-177,0) 4(-275.6,0)
  silkscreen extent -397,-80 121,251
USB-A-MALE [mil]
  oval 157.48x70.87 hole 39.37: 0(-1.65,449.43) 0(-1.65,0.61)
  round 65 hole 37: 1(-100,360) 2(-100,265) 3(-100,185) 4(-100,90)
  round 31.5 hole 43.31 unplated: MH1(-1.65,136.43) MH2(-1.65,313.6)
  silkscreen extent -41,2 92,452
USB-MICRO-Female-Lite [mm] "Connector; USB2.0, Type B, SM; 5 Position; Right Angle"
  rect 3.5x1.6 smd: 0(-2.802,0.088) 0(2.798,0.088)
  rect 0.45x2 smd: 1(1.298,-2.714) 2(0.648,-2.714) 3(-0.002,-2.714) 4(-0.652,-2.714) 5(-1.302,-2.714)
  silkscreen extent -3.92,-2.74 3.88,1.65
USB-MICRO-Lite [mm] "Connector; USB2.0, Type B, SM; 5 Position; Right Angle"
  rect 3.5x1.6 smd: 0(-2.802,0.088) 0(2.798,0.088)
  rect 0.45x2 smd: 1(1.298,-2.714) 2(0.648,-2.714) 3(-0.002,-2.714) 4(-0.652,-2.714) 5(-1.302,-2.714)
  silkscreen extent -3.92,-2.74 3.88,1.65
WATERDROP [mil]
  rect 70x400 smd: 1(35,250) 1(35,605) 2(760,215) 2(760,580)
  rect 350x70 smd: 1(180,770) 2(620,770)
  rect 400x70 smd: 1(255,465) 1(255,670) 1(260,85) 1(260,270) 1(480,85) 1(480,270) 1(480,465) 1(480,670) 2(200,-10) 2(330,180) 2(330,360) 2(330,570) 2(380,-10) 2(595,-10) 2(595,180) 2(595,360) 2(595,570)
XH2.54-2P [mil]
  oval 60x65 hole 39.37: 1(0,0) 2(-100.1,0)
  silkscreen extent -210,0 95,268
XTAL1 [mil]
  round 62 hole 28: 1(-0.36,-0.2) 2(199.64,-0.2)
  silkscreen extent -120,-80 300,80
XTAL_49S [mm] "Hole 1.6mm"
  round 1.6 hole 0.7: 1(2.54,0) 2(-2.54,0)
  silkscreen extent -5.45,-2.25 5.42,2.25

## Part data
C1 C3 C4 C5 C6 C7 C8 C11 C12: library part Capacitor_ST, "Capacitor 0402 / 0603 / 0805"
C2 C13: library part "CAP SMD 0603  X5R 1礔 25V 10%", "0603  X5R 1礔"
C100 C101 C102 C103 C111 C112 C113 C200 C201 C400 C601 C601_1 C607 C800 C805 C806 C807 C808 C809 C810: library part Cap, "Capacitor"
C602 C602_1: library part "Cap Pol1", "Polarized Capacitor (Radial)"
C603 C603_1 C604 C604_1 C605 C605_1 C606 C606_1 C608 C610: "Capacitor"
C608_1 C609_1 C610_1 C611_1: library part CAP
C609 C611 C801 C802 C803 C804: library part CAP, "Capacitor"
CN4: "Header, 6-Pin, Single row"
CN601_1 CN602: "USB A/B FEAML/MALE"
D106 D800: library part LED0, "Typical INFRARED GaAs LED"
D601 D601_1: "Typical RED GaAs LED"
D801: "DOUBLE SHOTTKEY DIODES"
F101 F601 F601_1 F801: library part "Fuse 1", "Fuse"
JP1: library part Jumper2-2, "Jumper2"
JP2 JP3: library part JP2
JP801: library part Jumper2-2
LD1 LD101 LD601: "Avago, HSMF-A203 Bi-Color LED"
LD1_1: "Bicolor Led"
LD200: library part LED, "Typical RED, GREEN, YELLOW, AMBER GaAs LED"
M201: "CC2530 SZ1 Module"
P1: "Header, 4-Pin"
P1_1: "Header, 2-Pin, Right Angle"
P101 P201 P201_1 P401 P603 P801: "Synio Header-L, 12-Pin"
P102 P202 P202_1 P402 P802: "Synio Header-R, 12-Pin"
P104 P105 P106 P602: "Header, 2-Pin, Dual row"
P600: "Header, 2-Pin"
R1 R2 R3 R4 R5 R6 R7 R8 R9 R13 R14 R15 R16 R17 R18 R19 R20 R21 R22 R24: library part Resistor_ST, "Resistor 0402 / 0603 / 0805"
R28 R29 R101 R102 R202 R204 R205 R602 R602_1 R603 R604 R604_1 R605 R605_1 R800: library part Res2, "Resistor"
R200 R400 R401 R601 R601_1: library part Res, "Resistor"
R201 R203: "Resistor"
R801 R802: library part res1, "Resistor"
RT201: library part "Res Thermal", "Thermistor"
S601 S801: library part SW-PB, "Switch"
U1 U102 U102_1 U602 U602_1: library part LDO-SOT23-5, "General LDO SOT23-5"
U2: "Medium-density performance line ARM-based 32-bit MCU with 64KB Flash"
U101: "USB to UART IC"
U201: "Programmable Resolution  1-Wire Digital Thermometer"
U202: library part 1838, "Photo Modules for PCM Remote Control Systems"
X1 X801 Y100 Y601 Y601_1: library part XTAL, "Crystal Oscillator"

## Free pads (board coordinates)
  round 60 hole 30: 2(2685,2700) 2(3830,2700)

## Via types
v1: diameter 32, hole 14, Top Layer to Bottom Layer, 220 vias
v2: diameter 50, hole 28, Top Layer to Bottom Layer, 18 vias
v3: diameter 25, hole 12, Top Layer to Bottom Layer, 15 vias
v4: diameter 22, hole 10, Top Layer to Bottom Layer, tented both sides, 1 vias
v5: diameter 32, hole 14, Top Layer to Bottom Layer, tented bottom, 1 vias

## Nets (pads, with @x,y where several pads share a name; then routed paths per layer and width w, separated by ;. In a path a pad name is that pad's centre, name@x,y a point inside that pad or via, vN(x,y) a via of type N, cw(c..) or ccw(c..) an arc to the next point about the centre after c; other vN are vias at no path point)
+3V3_ST_LINK: C1.2 C4.2 C7.2 C11.2 C12.2 C13.1 JP2.1 JP3.1 LD1_1.4 R7.2 R14.2 R16.2 R28.1 U1.5 U2.1 U2.9 U2.24 U2.36 U2.48 | length 3736.8
  Top Layer w8: v1(2855,3475) 2865,3475 2905.55,3434.45 R7.2@2906.66,3435.55 ; R7.2@2901.66,3430.55 C4.2@2979.45,3430.55 ; U2.1@3005.13,3218.24 2935,3288.37 2935,3305.55 2959.45,3330 2976.89,3330 U2.48@3005.13,3301.76 ; C7.2@3110.55,2990.55 3120,3000 3119.5,3000.5 3119.5,3030 3089.5,3060 3089.5,3079.9 U2.9@3116.48,3106.89 ; R16.2@3197.5,3595 3202.5,3590 C1.2@3202.5,3545 3202.5,3537.5 3235,3505 3255,3505 3265,3495 3265,3478.11 U2.36@3241.76,3454.87 ; U2.24@3394.87,3218.24 3395.76,3218.24 C11.2@3472.55,3141.45 ; JP2.1@3460,3490 JP2.1@3467.21,3490
  Top Layer w10: LD1_1.4@3819.06,3849.53 3849.53,3849.53 3850,3850 3875,3825 3875,3740 3855,3720 C13.1@3855,3682.5
  Top Layer w20: v1(3155,3595) R16.2@3197.5,3595 ; v1(3220,3005) 3252.5,2972.5 R14.2@3252.5,2935 ; 3670.15,3690 3694,3690 3700,3684 R28.1@3723,3684 3724.5,3682.5 C12.2@3780,3682.5 v1(3810,3682.5) ; v1(3835,3682.5) C13.1@3855,3682.5
  Top Layer w30: C7.2@3110.55,2990.55 3121.11,2980 3195,2980 v1(3220,3005)
  Bottom Layer w30: v1(2950,3320) 2867.5,3402.5 2867.5,3487.5 2955,3575 2955,3590 2960,3595 v1(3155,3595) 3315,3595 3417,3493 3463,3493 3525,3555 3765,3555 3810,3600 v1(3810,3682.5) ; v1(3220,3005) 3222,3003 3335,3003 ; JP3.1@3460,2865 3335,2990 3335,3003 ; JP2.1@3460,3490 3545,3405 3545,3265 3458,3178 v1(3437,3178) 3437,3092 3348,3003 3335,3003
  other v1: 2960,3260
AIN_1: R1.1 R9.1 U2.10 | length 1109.2
  Top Layer w7: U2.10@3130.4,3092.97 3157.44,3120 3170,3120 3192.78,3097.22 3192.78,3072.22 3265.5,2999.5 3290.5,2999.5 3291,3000 R9.1@3472.5,3000 3472.5,2982.5 3505,2950 v1(3610,2950) v1@3602.5,2942.5 ; v1(3592,3373) 3624,3405 R1.1@3652.5,3405
  Bottom Layer w7: v1@3590,3380 3590,3080 3610,3060 v1(3610,2950)
CE: M401.3 R400.2 SB403.2 SB404.2 | length 855
  Top Layer w10: SB403.2@2378.83,1587.54 2383.83,1582.54 SB404.2@2383.83,1499.54
  Top Layer w15: M401.3@1838.72,1730.77 1838.72,1617.65 R400.2@1841.83,1614.54 ; v2(2276.83,1594.54) 2371.83,1594.54 SB403.2@2378.83,1587.54
  Bottom Layer w15: M401.3@1838.83,1753.54 1838.83,1687.54 1931.83,1594.54 v2(2276.83,1594.54)
CH_CTS: P106.1 U101.9 | length 734.8
  Top Layer w15: v1(3120,805) 3123.54,801.46 U101.9@3123.54,760
  Bottom Layer w15: v1@3115,810 v1(3120,805) 3130,795 3430,795 3505,870 3505,955 3530,980 3600,980 P106.1@3650,1030
CH_RTS: P106.4 U101.14 | length 909.7
  Top Layer w15: v1(3045,505) 3055,505 3060,510 U101.14@3123.54,510
  Bottom Layer w15: v1@3045,495 3045,675 3140,770 3445,770 3565,890 P106.4@3565,930
CH_RX: LD101.1 P104.1 P105.1 U101.3 | length 2024.6
  Top Layer w10: LD101.1@2795,1185 2766,1156 2766,981.5 2800,947.5 2800,785 2855,730 2890,730 P104.1@2955,665 3010,610 3010,550 2960,500 2960,325 3005,280 3180,280 3220,320 3220,490 3240,510 U101.3@3316.46,510
  Top Layer w15: U101.3@3316.46,510 3465,510 3540,435 3615,435 3665,385 P105.1@3665,345
CH_TX: LD101.2 P104.4 P105.4 U101.2 | length 2053.9
  Top Layer w10: LD101.2@2840,1185 2840,1215 2835,1220 2765,1220 2750,1205 2750,974.87 2775,949.87 2775,765 2795,745 2795,625 P104.4@2855,565 2855,555 2930,480 2930,315 2981,264 3204,264 3240,300 3240,445 3255,460 U101.2@3316.46,460
  Top Layer w15: U101.2@3316.46,460 3405,460 3460,405 3460,320 3535,245 P105.4@3565,245
CSN: M401.4 P401.2 R401.2 | length 922
  Top Layer w15: P401.2@1401.83,1499.54 1516.83,1499.54 1646.83,1629.54 1646.83,1799.54 1681.83,1834.54 1846.83,1834.54 1888.72,1792.65 M401.4@1888.72,1730.77 1888.72,1617.65 R401.2@1891.83,1614.54
CTS1: P102.7 P106.3 | length 497.7
  Top Layer w10: P106.3@3550,1030 P106.3@3557.5,1022.5 ; P106.3@3565,1030 3565,1025 3615,975 3700,975 3745,930 3745,745 P102.7@3800,690
D3V3: C102.2 C103.2 C111.2 C200.2 C201.2 C400.1 C601.2 C601_1.2 C602.1 C602_1.1 C603.2 C603_1.2 C604.2 C604_1.2 C607.2 C610.2 C610_1.2 C611.2 C611_1.2 C804.1 C805.1 C806.1 C807.1 D601.1 D601_1.1 D801.3 LD200.1 M201.3 M201.4 M401.1 P103.1 P203.1 P203_1.1 P403.1 P601.1 R101.2 R102.1 R201.2 R203.2 R400.1 R401.1 R602.1 R602_1.1 R603.1 R604.1 R604_1.1 R800.2 R801.1 R802.2 RT201.1 U101.4 U101.16 U102.5 U201.3 U202.3 U601.6 U601.13 U601.20 U601_1.6 U601_1.13 U601_1.20 U602.5 U602_1.5 U801.5 U801.16 | length 17148.9
  Top Layer w10: C601_1.2@290,3295 297.8,3287.2 332.8,3287.2 U601_1.6@416.06,3287.2 ; C807.1@393,557 432,518 563,518 575.8,530.8 U801.5@575.8,570.27 ; C804.1@575.8,267 U801.16@575.8,353.73 ; U601_1.20@693.78,3415 U601_1.20@693.94,3415.16 745,3415.16 754.84,3415.16 765,3405 C603_1.2@785,3405 ; U601_1.13@693.94,3236.02 806.02,3236.02 C602_1.1@810,3240 815,3235 C604_1.2@815,3175 ; C603_1.2@790,3400 C603_1.2@785,3405 ; C603_1.2@790,3410 C603_1.2@785,3405 ; v1@1775,660 1770,655 C601.2@1820,605 1837.8,587.2 U601.6@1921.06,587.2 ; U601.20@2198.78,715 U601.20@2198.94,715.16 2250,715.16 2259.84,715.16 2270,705 C603.2@2290,705 ; C603.2@2295,700 C603.2@2290,705 ; C603.2@2295,710 C603.2@2290,705 ; C602.1@2311.02,536.02 C602.1@2312.5,537.5 ; U101.16@3145,410 3180,410 3200,430 3200,535 3225,560 U101.4@3316.46,560
  Top Layer w12: U601.13@2198.94,536.02 2291.02,536.02 C602.1@2310,555
  Top Layer w15: R602.1@1620,1075 1650,1075 1660,1085 1660,1205 1675,1220 D601.1@1700,1220 ; D601.1@1700,1215 1725,1215 1745,1195 1745,1135 1845,1035 1845,855 v2@1900,800 ; C111.2@3123.54,341.46 U101.16@3123.54,410 U101.16@3145,410 ; C111.2@3125,335 3175,335 v1(3180,330)
  Top Layer w20: R602_1.1@130,3600 245,3485 280,3485 240,3445 240,3325 270,3295 C601_1.2@290,3295 ; C804.1@583,267 v1@609.75,267 ; C603_1.2@800,3410 800,3450 830,3480 945,3480 ; C602_1.1@810,3240 810,3255 860,3305 910,3305 945,3340 945,3480 ; U602_1.5@1060,3316.3 1060,3345 1075,3360 C611_1.2@1075,3385 ; D601_1.1@1120,3795 1165,3795 1185,3775 1185,3555 1135,3505 1060,3505 ; R604_1.1@1140,3385 C611_1.2@1075,3385 ; v2(2175,775) 2180,780 2295,780 ; C603.2@2295,710 2295,780 ; C602.1@2310,540 2312.5,537.5 C604.2@2312.5,495 ; C602.1@2310,555 2310,565 2425,680 ; U602.5@2365,1023.7 2365,995 2350,980 C611.2@2350,955 R604.1@2285,955 2285,930 2266.69,911.69 2266.69,873.31 2295,845 2295,780 ; 2366.69,780 2295,780 ; R201.2@3363.17,1890.46 3398.17,1925.46 C201.2@3443.17,1925.46 3463.17,1905.46 U201.3@3618.17,1905.46 ; v2(3388.17,1445.46) 3413.17,1420.46 3648.17,1420.46 3703.17,1475.46 U202.3@3703.17,1495.46 3703.17,1575.46 C200.2@3678.17,1600.46 ; 945,3480 970,3505 1060,3505 ; 1060,3505 1071.69,3493.31 C610_1.2@1071.69,3450 1071.69,3388.31 C611_1.2@1075,3385
  Top Layer w25: R802.2@550.5,1209.5 588,1172 v1@678,1172 ; R802.2@553,1222 558,1217 R800.2@623,1217 ; R801.1@778,557 808,557 828,537 828,392 ; C806.1@783,377 813,377 828,392 ; v1(858,907) 883,882 883,637 973,547 973,377 928,332 908,332 908,322 ; v1(943,287) 908,322 ; M201.4@1544.4,3291.76 1608.17,3291.76 1658.17,3341.76 ; M201.3@1544.4,3341.76 1658.17,3341.76 ; C400.1@1738.72,1612.65 C400.1@1748.72,1612.65 ; M401.1@1738.72,1730.77 1738.72,1622.65 C400.1@1748.72,1612.65 ; v2(1839.47,2830.46) 2068.17,2830.46 2188.17,2710.46 P203.1@2188.17,2685.46 ; v2(1839.47,3341.76) 1658.17,3341.76 ; R401.1@1891.83,1554.54 R400.1@1836.83,1554.54 1784.33,1554.54 1781.83,1557.04 ; P601.1@2180,95 2215,95 2320,200 C607.2@2320,245 2320,320 R603.1@2325,325 2325,370 2345,390 2395,390 2465,460 2465,640 2425,680 2425,765 2410,780 2366.69,780 ; P403.1@2201.83,1399.54 2111.83,1489.54 1806.83,1489.54 1781.83,1514.54 1781.83,1557.04 ; R102.1@2815,995 2865,995 v1(2880,980) ; RT201.1@3088.17,1585.46 3088.17,1545.46 3118.17,1515.46 3258.17,1515.46 3363.17,1620.46 R201.2@3363.17,1890.46 ; v2(3183.17,2405.46) 3188.17,2400.46 3188.17,2350.46 ; R203.2@3188.17,2215.46 3188.17,2350.46 ; v1@3215,915 3240,940 3415,940 ; v1(3230,200) 3415,200 3500,115 P103.1@3500,90 ; 3405,855 C103.2@3405,895 3405,910 3415,920 3415,940 ; LD200.1@3563.17,2350.46 3188.17,2350.46 ; R101.2@3575,1150 3525,1150 3480,1105 3480,1015 3458.7,993.7 U102.5@3415,993.7 3415,940 ; 828,392 873,347 883,347 908,322 ; C400.1@1748.72,1612.65 1768.72,1612.65 1781.83,1599.54 1781.83,1557.04
  Bottom Layer w15: v2(1900,810) 2150,810 2185,775 v2(2175,775)
  Bottom Layer w20: v1@280,3485 285,3480 v1(820,3480) v1@830,3480 ; v1(398,557) 408,557 448,517 448,347 531.25,263.75 v1(609.75,263.75) 773,263.75 791.25,282 D801.3@923.43,282 ; v1(1775,655) 1780,655 1890,765 1890,800 v2(1900,810) ; RT201.1@3088.17,1585.46 3088.17,1550.46 3083.17,1545.46 3183.17,1445.46 v2(3388.17,1445.46)
  Bottom Layer w25: v1(678,1177) 753,1177 858,1072 v1(858,907) ; v2(1839.47,2830.46) v2(1839.47,3341.76) ; v1@2880,985 v1(2880,980) 2880,975 2930,925 2930,850 2960,820 3045,820 ; P203_1.1@3003.17,2555.46 3003.17,2470.46 3068.17,2405.46 v2(3183.17,2405.46) ; v1(3180,330) 3220,290 3220,275 ; R203.2@3188.17,2215.46 3363.17,2040.46 R201.2@3363.17,1890.46 ; v1(3220,915) 3155,850 3075,850 3045,820 ; v1(3230,200) 3220,210 3220,275 ; 3045,820 3045,716.16 3015.89,687.06 3015.89,550.89 2970,505 2970,290 2990,270 3215,270 3220,275
  other v1: 280,3480
D5V: C100.2 C101.2 C608.2 C608_1.2 C609.2 C609_1.2 C809.2 C810.2 CN602.1 F101.1 F601.1 F601_1.1 F801.1 U102.1 U102.3 U102_1.1 U102_1.3 U602.1 U602.3 U602_1.1 U602_1.3 | length 3518.9
  Top Layer w15: U102.3@3340.2,1100 3340.2,1065.2 3335,1060 3350,1045 3400,1045 3415,1060 U102.1@3415,1100
  Top Layer w18: C609_1.2@1120,3060 C609_1.2@1128.31,3068.31 ; 2200,1165 2200,1245 2235,1280 2305,1280 C609.2@2296.69,1271.69
  Top Layer w23: U602_1.1@1060,3210 1060,3255 1065,3260 1120,3260 1134.8,3245.2 U602_1.3@1134.8,3210 C608_1.2@1134.8,3131.5 ; F601.1@2160,1020 2160,1125 2200,1165 ; C608.2@2290.2,1208.5 U602.3@2290.2,1130 2290.2,1094.8 2305,1080 2360,1080 2365,1085 U602.1@2365,1130 ; F101.1@3255,1110 3320,1175 C101.2@3340,1175 ; C100.2@3340,1235 C101.2@3340,1175 ; U102.3@3340.2,1100 3340,1100.2 C101.2@3340,1175
  Top Layer w25: C609_1.2@1125,3060 1125,2980 F601_1.1@1140,2965 ; C609_1.2@1128.31,3068.31 C608_1.2@1128.31,3125 C608_1.2@1134.8,3131.5 ; C608.2@2290.2,1208.5 2296.69,1215 C609.2@2296.69,1271.69
  Top Layer w30: CN602.1@775,3670 775,3835 815,3875 1205,3875 1255,3825 1255,3030 1190,2965 F601_1.1@1140,2965
  Bottom Layer w16: U102_1.1@928,1047 928,1007 933,1002 988,1002 1002.8,1016.8 U102_1.3@1002.8,1047
  Bottom Layer w20: F801.1@933,1242 933,1227 993,1167 C810.2@993,1157 C809.2@993,1112 1002.8,1102.2 U102_1.3@1002.8,1047
DSQ: SB206_1.2 U201.2 | length 1209.9
  Top Layer w15: SB206_1.2@2866.17,1475.46 2871.17,1470.46 3308.17,1470.46 3523.17,1685.46 3603.17,1685.46 3703.17,1785.46 3703.17,1930.46 3678.17,1955.46 U201.2@3618.17,1955.46
EX_D3V3: D801.1 P803.1 | length 218.9
  Top Layer w20: P803.1@888,77 888,207 v1(908,227)
  Bottom Layer w20: D801.1@852.57,244.6 895.4,244.6 v1@908,232

## Text inside footprints (layer, text, board x,y; h text height)
U201: Top Overlay "1" at 3522.86,2033.37 h59.05 r180; Top Overlay "3" at 3522.86,1937.07 h59.05 r180